# EAGLE board ArduinoWriter (EAGLE 9.6.2)
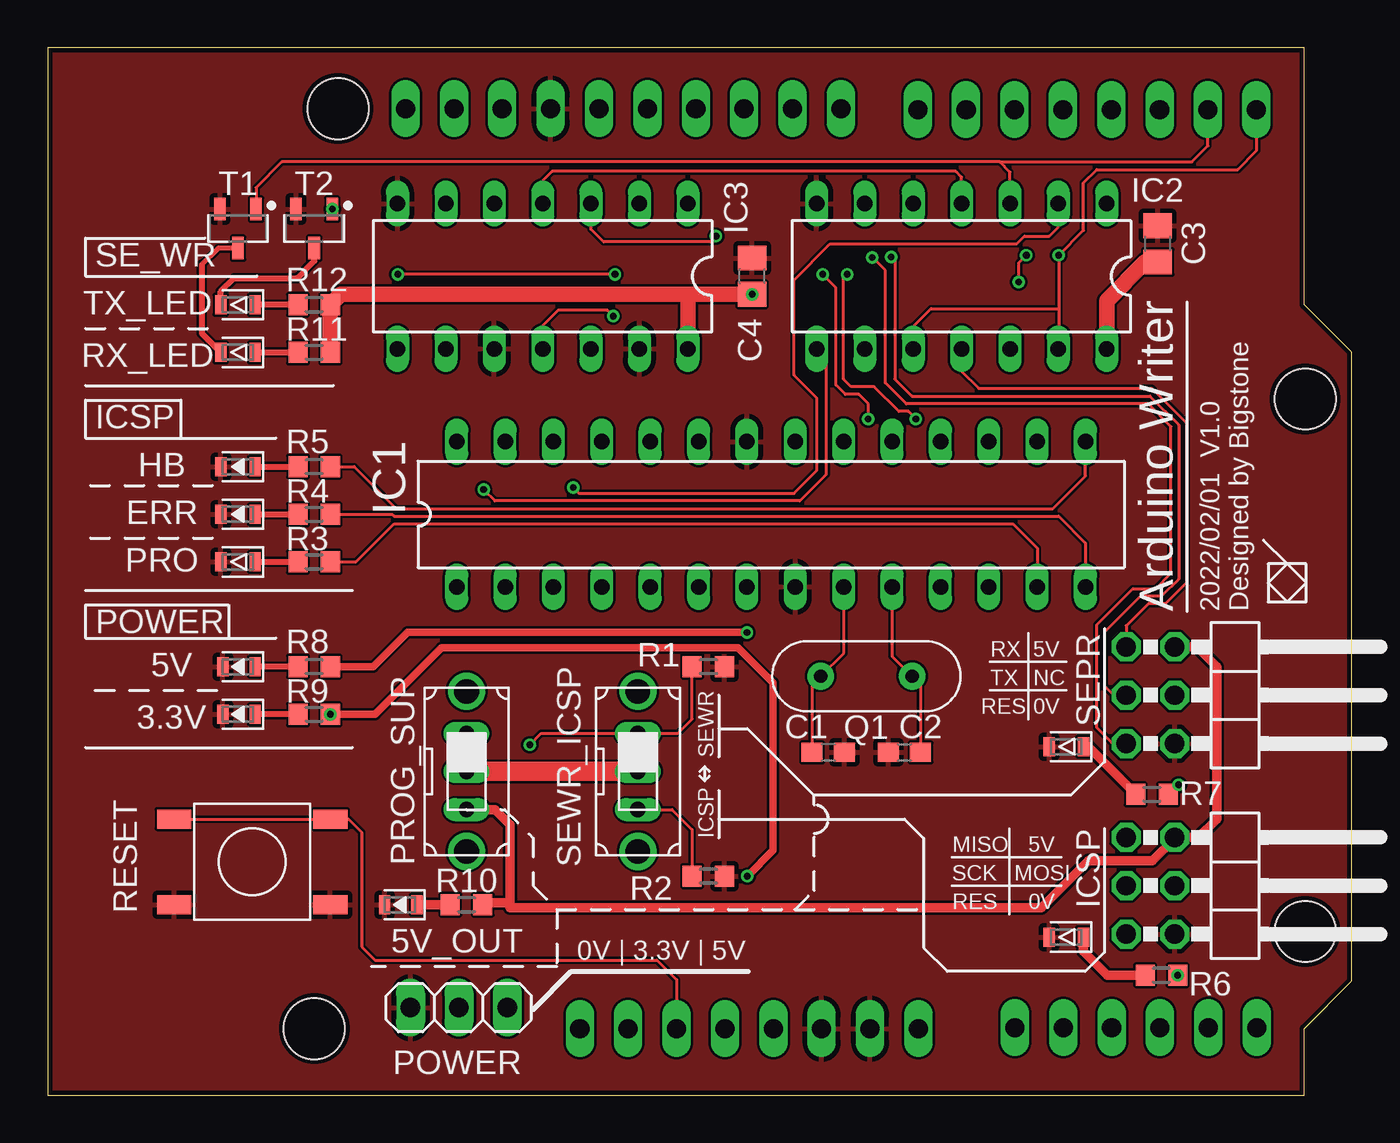
[diagram p0: board, top side]
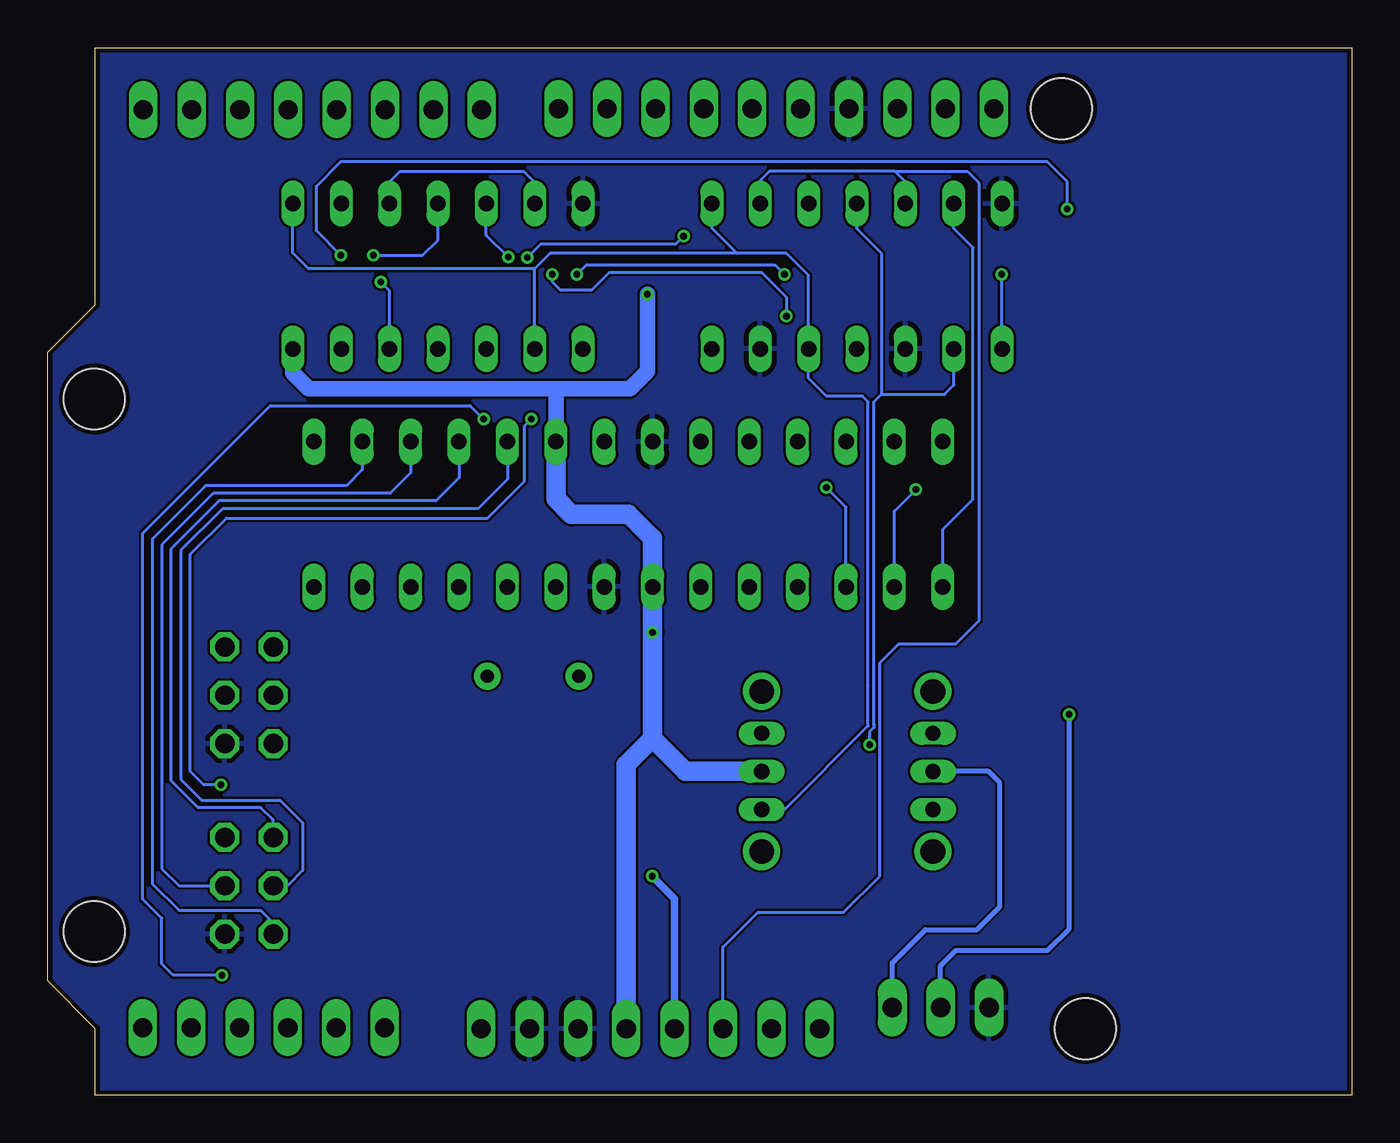
[diagram p1: board, bottom side, seen from below]

Size 68.5 x 55 mm. Coordinates in mm from the lower left corner, seen from the top.
Outline: 0,0 66,0 66,3.5 68.5,6 68.5,39 66,41.5 66,55 0,55 0,0
Copper layers (1*16): Top 0.035mm / dielectric 1.6mm / Bottom 0.035mm
Design rules "JLPCB_2layer": minimum track width 5mil, minimum drill 0.2mm, track to track 5mil, track to pad 5mil, pad to pad 5mil, via to via 5mil, smd to smd 0mil, copper to edge 0.25mm, drill to drill 0.25mm, minimum pad ring 6mil, minimum via ring 6mil, stop-mask expansion 0mil, vias tented up to drill 0.6mm, thermal gap 10mil
Net classes: 1 power: clearance 0.127 mm
Holes 3.2 mm at 14,3.5 15.25,51.8 66.05,36.55 66.05,8.6

## Footprints (pad centres in the part's own frame; a part is rotated, then mirrored left to right if it is on the bottom)
LEDC1608X39N_B = smd 0.6 x 1: 1 -0.9,0; 2 0.8,0
C0603 = smd 1.1 x 1: 1 -0.85,0; 2 0.85,0
C0805 = smd 1.3 x 1.5: 1 -0.95,0; 2 0.95,0
LEDC1608X39N_R = smd 0.6 x 1: 1 -0.9,0; 2 0.9,0
DIL28-3 = drill 0.813 long: 1 -16.51,-3.81; 2 -13.97,-3.81; 3 -11.43,-3.81; 4 -8.89,-3.81; 5 -6.35,-3.81; 6 -3.81,-3.81; 7 -1.27,-3.81; 8 1.27,-3.81; 9 3.81,-3.81; 10 6.35,-3.81; 11 8.89,-3.81; 12 11.43,-3.81; 13 13.97,-3.81; 14 16.51,-3.81; 15 16.51,3.81; 16 13.97,3.81; 17 11.43,3.81; 18 8.89,3.81; 19 6.35,3.81; 20 3.81,3.81; 21 1.27,3.81; 22 -1.27,3.81; 23 -3.81,3.81; 24 -6.35,3.81; 25 -8.89,3.81; 26 -11.43,3.81; 27 -13.97,3.81; 28 -16.51,3.81
DIL14 = drill 0.813 long: 1 -7.62,-3.81; 2 -5.08,-3.81; 3 -2.54,-3.81; 4 0,-3.81; 5 2.54,-3.81; 6 5.08,-3.81; 7 7.62,-3.81; 8 7.62,3.81; 9 5.08,3.81; 10 2.54,3.81; 11 0,3.81; 12 -2.54,3.81; 13 -5.08,3.81; 14 -7.62,3.81
2X03/90 = drill 1.016 octagon: 1 -2.54,-6.35; 2 -2.54,-3.81; 3 0,-6.35; 4 0,-3.81; 5 2.54,-6.35; 6 2.54,-3.81
LEDC1608X39N_G = smd 0.6 x 1: A -0.9,0; K 0.9,0
1X03 = drill 1.016 long: 1 -2.54,0; 2 0,0; 3 2.54,0
SS-12D01-VG4 = drill 0.8 long: COM 0,0; NC -2,0; NO 2,0 | drill 1.3: P$4 -4.2,0; P$5 4.2,0
XTALRR480W50L990T368H350B = drill 0.7 pad 1.4: 1 -2.4,0; 2 2.4,0
R0603 = smd 1 x 1.1: 1 -0.85,0; 2 0.85,0
TS-06104 = smd 1.8 x 1: A1 -4.1,2.25; A2 4.1,2.25; B1 -4.1,-2.25; B2 4.1,-2.25
SOT95P240X110-3N = smd 1.18 x 0.609: 1 -1.024,0.95; 2 -1.024,-0.95; 3 1.024,0
ARDUINOUNO_NOSILK = drill 1 long: 0 63.48,50.75; 1 60.94,50.75; 2 58.4,50.75; 3 55.86,50.75; 3.3V 35.57,2.5; 4 53.32,50.75; 5 50.78,50.75; 5V 38.11,2.5; 6 48.24,50.75; 7 45.7,50.75; 8 41.66,50.8; 9 39.12,50.8; 10 36.58,50.8; 11 34.04,50.8; 12 31.5,50.8; 13 28.96,50.8; A0 50.8,2.55; A1 53.34,2.55; A2 55.88,2.55; A3 58.42,2.55; A4 60.96,2.55; A5 63.5,2.55; AREF 23.88,50.8; GND 26.42,50.8; GND1 43.19,2.5; GND2 40.65,2.5; IOREF 30.49,2.5; P$6 27.95,2.5; RESET 33.03,2.5; SCL 18.8,50.8; SDA 21.34,50.8; VIN 45.73,2.5

## Placement (x,y rotation side)
3.3V  OSBL1608C1A  [LEDC1608X39N_B]  10,20 180 top
5V  OSBL1608C1A  [LEDC1608X39N_B]  10,22.5 180 top
5V_OUT  OSBL1608C1A  [LEDC1608X39N_B]  18.5,10 180 top
C1  22p  [C0603]  41,18 180 top
C2  22p  [C0603]  45,18 0 top
C3  10u  [C0805]  58.3,44.7 90 top
C4  10u  [C0805]  37,43 90 top
ERR  OSHR1608C1A  [LEDC1608X39N_R]  10,30.5 180 top
HB  OSHR1608C1A  [LEDC1608X39N_R]  10,33 180 top
IC1  ATMEGA328-PU  [DIL28-3]  38,30.5 0 top
IC2  TC74HC08AP  [DIL14]  48,43 180 top
IC3  TC74HC32AP  [DIL14]  26,43 180 top
ICSP  [2X03/90]  63,11 270 top
ISPMODE  OSTG1608C1A  [LEDC1608X39N_G]  53.5,8.3 180 top
POWER  [1X03]  21.6,4.6 180 top
PRO  OSTG1608C1A  [LEDC1608X39N_G]  10,28 180 top
PROG_SUP  SS-12D01-VG4  [SS-12D01-VG4]  22,17 270 top
Q1  HUSG-16.000-20  [XTALRR480W50L990T368H350B]  43,22 180 top
R1  10k  [R0603]  34.7,22.5 180 top
R2  10k  [R0603]  34.7,11.5 180 top
R3  1k  [R0603]  14,28 0 top
R4  1k  [R0603]  14,30.5 0 top
R5  1k  [R0603]  14,33 0 top
R6  1k  [R0603]  58.5,6.3 0 top
R7  1k  [R0603]  58,15.8 0 top
R8  1k  [R0603]  14,22.5 0 top
R9  1k  [R0603]  14,20 0 top
R10  1k  [R0603]  22,10 0 top
R11  1k  [R0603]  14,39 0 top
R12  1k  [R0603]  14,41.5 0 top
RESET  TS-06104  [TS-06104]  10.75,12.25 0 top
RX_LED  OSTG1608C1A  [LEDC1608X39N_G]  10,39 180 top
SEPR  [2X03/90]  63,21 270 top
SEWR_ICSP  SS-12D01-VG4  [SS-12D01-VG4]  31,17 270 top
SEWRMODE  OSTG1608C1A  [LEDC1608X39N_G]  53.5,18.3 180 top
T1  IRLML6344TRPBF  [SOT95P240X110-3N]  10,45.5 270 top
T2  IRLML6344TRPBF  [SOT95P240X110-3N]  14,45.5 270 top
TX_LED  OSTG1608C1A  [LEDC1608X39N_G]  10,41.5 180 top
U1  ARRDUINOUNO-NOSILK  [ARDUINOUNO_NOSILK]  0,1 0 top

## Library data of the parts
3.3V 5V 5V_OUT ERR HB ISPMODE PRO RX_LED SEWRMODE TX_LED = LED
C1-C4 = RCL; SPICEPREFIX: C
IC1 = Arduino-AVR
IC2 IC3 = 東芝_74LSシリーズ
ICSP POWER SEPR = pinhead
PROG_SUP SEWR_ICSP = スライドスイッチ
Q1 = 水晶振動子
R1-R12 = RCL; SPICEPREFIX: R
RESET = タクトスイッチ
T1 T2 = FET
U1 = Arduino

## Nets
+3.3V: POWER.2 R9.2 U1.3.3V
+5V: C3.1 C4.1 IC1.7 IC1.20 IC2.14 IC3.14 POWER.1 PROG_SUP.COM R8.2 R11.2 R12.2 SEWR_ICSP.COM U1.5V
ERROR: IC1.14 R4.2
GND: 3.3V.2 5V.2 5V_OUT.2 C1.1 C2.1 C3.2 C4.2 ERR.2 HB.2 IC1.8 IC1.22 IC2.7 IC3.7 IC3.10 IC3.13 ICSP.6 ISPMODE.K POWER.3 PRO.K R1.1 R2.1 RESET.B1 RESET.B2 SEPR.6 SEWRMODE.K T1.2 T2.2 U1.GND U1.GND1 U1.GND2
HEARTBEAT: IC1.15 R5.2
ICSP_RESET: IC1.16 ICSP.5
MISO: IC1.18 ICSP.1
MOSI: IC1.17 ICSP.4
N$1: C2.2 IC1.10 Q1.1
N$2: C1.2 IC1.9 Q1.2
N$3: PRO.A R3.1
N$4: ERR.1 R4.1
N$5: HB.1 R5.1
N$6: ISPMODE.A R6.1
N$7: R7.1 SEWRMODE.A
N$8: 5V.1 R8.1
N$9: 3.3V.1 R9.1
N$10: 5V_OUT.1 R10.1
N$11: RX_LED.K T1.3
N$12: T2.3 TX_LED.K
N$13: R11.1 RX_LED.A
N$14: R12.1 TX_LED.A
PCRX_ICTX: IC2.3 IC2.6 T1.1 U1.1
PCTX_ICRX: IC2.10 IC2.13 T2.1 U1.0
PROG_SUPPLY: ICSP.2 PROG_SUP.NO R10.2 SEPR.2
PROGRAMMING: IC1.13 R3.2
RESET_SIG: IC3.2 IC3.5 RESET.A1 RESET.A2 U1.RESET
SCK: IC1.19 ICSP.3
SE_RESET: IC3.3 SEPR.5
SE_RX: IC2.11 SEPR.1
SE_SW: IC2.4 IC2.12 IC3.4 IC3.9 R1.2 SEWR_ICSP.NC
SE_SW_LED: IC3.8 R7.2
SE_TX: IC2.5 SEPR.3
WR_SW: IC2.1 IC2.9 IC3.1 IC3.12 R2.2 SEWR_ICSP.NO
WR_SW_LED: IC3.11 R6.2
WRITER_RESET: IC1.1 IC3.6
WRITER_RX: IC1.2 IC2.8
WRITER_TX: IC1.3 IC2.2

## Tracks (layer width: path | path; a pad name or v marks a point on that pad's centre or on a via)
+3.3V  (via drill 0.35)
  Top 0.254: 15.07,19.78 R9.2
  Top 0.406: R9.2 17.2,20 20.7,23.5 36.25,23.5 38.1,21.65 38.1,12.85 v36.75,11.5
  Bottom 0.254: POWER.2 21.6,6.8 20.8,7.6 16,7.6 14.85,8.75 R9.2
  Bottom 0.406: v36.75,11.5 35.57,10.32 U1.3.3V
  other vias: 14.85,20
+5V  (via drill 0.35)
  Top 0.406: R8.2 17.1,22.5 18.9,24.3 v36.73,24.3
  Top 0.813: R11.2 R12.2 15.4,42.05 33.6,42.05 | 33.6,42.05 C4.1 | IC3.14 33.62,42.03 33.6,42.05 | IC2.14 55.62,41.72 57.65,43.75 C3.1
  Top 1.016: PROG_SUP.COM SEWR_ICSP.COM
  Bottom 0.254: POWER.1 24.14,6.96 22.4,8.7 19.7,8.7 18.5,9.9 18.5,16.4 19.1,17 PROG_SUP.COM
  Bottom 0.813: IC1.20 41.81,36.99 41.7,37.1 | 41.7,37.1 37.9,37.1 37,38 C4.1 | IC2.14 55.62,37.92 54.8,37.1 41.7,37.1
  Bottom 1.016: IC1.20 41.81,31.31 41,30.5 38,30.5 36.73,29.23 IC1.7 v36.73,24.3 36.73,18.73 | SEWR_ICSP.COM 35,17 36.73,18.73 | U1.5V 38.11,17.35 36.73,18.73
  other vias: 37,42.05
ERROR
  Top 0.15: R4.2 18.1,30.5
  Top 0.152: 18.1,30.5 18.2,30.4 53.1,30.4 54.51,28.99 IC1.14
GND
  pour Top: 0,0 0,55 69,55 69,0
  pour Bottom: 0,55 0,0 69,0 69,55
HEARTBEAT
  Top 0.152: R5.2 16.1,33 18.3,30.8 52.8,30.8 54.51,32.51 IC1.15
ICSP_RESET
  Bottom 0.152: IC1.16 51.97,32.83 52.8,32 60.2,32 63,29.2 63,11.1 61.6,9.7 57.3,9.7 56.65,9.05 ICSP.5
MISO
  Bottom 0.152: IC1.18 46.89,32.41 48.1,31.2 59.5,31.2 62,28.7 62,16.5 60.6,15.1 57.3,15.1 56.65,14.45 ICSP.1
MOSI
  Bottom 0.152: IC1.17 49.43,32.67 50.5,31.6 59.8,31.6 62.5,28.9 62.5,11.9 61.6,11 ICSP.4
N$1
  Top 0.152: IC1.10 44.35,23.05 Q1.1 45.85,21.55 C2.2
N$2
  Top 0.152: IC1.9 41.81,23.21 Q1.2 40.15,21.55 C1.2
N$3
  Top 0.305: PRO.A R3.1
N$4
  Top 0.305: ERR.1 R4.1
N$5
  Top 0.305: HB.1 R5.1
N$6
  Top 0.508: R6.1 55.65,6.3 54.4,7.55 ISPMODE.A
N$7
  Top 0.508: R7.1 54.65,18.3 SEWRMODE.A
N$8
  Top 0.305: R8.1 5V.1
N$9
  Top 0.305: R9.1 3.3V.1
N$10
  Top 0.508: 5V_OUT.1 R10.1
N$11
  Top 0.254: T1.3 8.98,44.48 8.1,43.6
  Top 0.305: 8.1,43.6 8.1,40 RX_LED.K
N$12
  Top 0.305: TX_LED.K 9.1,42.2 9.8,42.9 13.1,42.9 14,43.8 T2.3
N$13
  Top 0.305: RX_LED.A R11.1
N$14
  Top 0.305: R12.1 TX_LED.A
PCRX_ICTX
  Top 0.152: U1.1 60.94,49.84 60.1,49 50,49 | 50,49 12.3,49 10.95,47.65 T1.1 | IC2.3 50.54,48.46 50,49
  Bottom 0.152: IC2.3 50.54,47.96 50,48.5 43.5,48.5 42.92,47.92 IC2.6
PCTX_ICRX  (via drill 0.35)
  Top 0.152: IC2.10 45.46,40.36 46.4,41.3 53.1,41.3 | 53.1,41.3 53.1,39.21 IC2.13 | 53.1,41.3 v53.1,44.1 54.4,45.4 54.4,47.9 55.1,48.6 62.5,48.6 63.5,49.6 63.5,51.73 U1.0
  Bottom 0.152: T2.1 14.95,47.95 16,49 53.1,49 54.4,47.7 54.4,45.4 v53.1,44.1
  other vias: 14.95,46.52
PROG_SUPPLY
  Top 0.508: PROG_SUP.NO 23.5,15 24.3,14.2 24.3,10.6 24.3,10.1 | SEPR.2 60.36,23.54 61.4,22.5 61.4,14.5 60.44,13.54 ICSP.2 59.23,13.5 58.03,12.3 54.65,12.3 52.2,9.85 24.3,9.85 24.3,10.1 | R10.2 22.95,10.1 24.3,10.1
PROGRAMMING
  Top 0.152: R3.2 16.2,28 18.2,30 50.7,30 51.97,28.73 IC1.13
RESET_SIG
  Top 0.152: RESET.A1 RESET.A2 15.8,14.5 16.5,13.8 16.5,7.8 17.2,7.1 32,7.1 33.03,6.07 U1.RESET
  Bottom 0.152: IC3.5 23.46,47.96 24,48.5 | 24,48.5 30.6,48.5 31.1,48 31.1,46.83 IC3.2 | U1.RESET 33.03,7.77 31.2,9.6 26.7,9.6 24.8,11.51 24.8,22.7 23.8,23.7 20.8,23.7 19.59,24.91 19.59,47.9 20.2,48.5 24,48.5
SCK
  Bottom 0.152: IC1.19 44.35,32.35 45.9,30.8 59.3,30.8 61.5,28.6 61.5,16.6 60.4,15.5 56.3,15.5 55.1,14.3 55.1,11.8 55.9,11 ICSP.3
SE_RESET  (via drill 0.35)
  Top 0.152: SEPR.5 55.94,18.46 55.1,19.3 55.1,24.7 57,26.6 58.2,26.6 59,27.4 59,35.1 57.8,36.3 45.1,36.3 44,37.4 44,43.3 43.31,43.99 v43.3,43.99 | v35.1,45.1 34.8,44.8 29.2,44.8 28.54,45.46 IC3.3
  Bottom 0.152: v43.3,43.99 42.59,44.7 35.5,44.7 v35.1,45.1
SE_RX
  Top 0.152: IC2.11 48,38.01 48.9,37.1 57.99,37.1 59.8,35.3 59.8,26.9 58.7,25.8 57.8,25.8 56.65,24.65 SEPR.1
SE_SW  (via drill 0.35)
  Top 0.15: v25.33,18.4 25.93,19 SEWR_ICSP.NC 33.1,19 33.85,19.75 R1.2
  Top 0.152: IC2.4 48,48.2 47.7,48.5 26.5,48.5 26,48 IC3.4 | v51,42.7 51,43.7 v51.4,44.1
  Bottom 0.15: 25.1,19.5 25.1,19.31 25.33,19.08 v25.33,18.4
  Bottom 0.152: IC3.4 26,45.5 24.7,44.2 24.7,36.8 | 25.1,19.4 25.1,19.5 25.1,36.4 24.7,36.8 | 24.7,36.8 21.4,36.8 20.9,37.3 20.9,39.17 IC3.9 | IC2.12 50.54,42.24 v51,42.7 | v51.4,44.1 48.8,44.1 48,44.9 IC2.4
SE_SW_LED  (via drill 0.35)
  Top 0.152: R7.2 59.35,16.3 v59.4,16.3 | v43.1,35.5 43.1,36.3 42.6,36.8 41.9,36.8 41.4,37.3 41.4,42.4 v40.7,43.1 | v29.8,43.1 v18.4,43.1
  Bottom 0.152: v59.4,16.3 60.3,16.3 61,17 61,28.4 59.1,30.3 45.4,30.3 43.46,32.24 43.46,35.14 v43.1,35.5 | v40.7,43.1 40.2,43.6 30.3,43.6 v29.8,43.1 | v18.4,43.1 18.4,39.21 IC3.8
SE_TX  (via drill 0.35)
  Top 0.152: v44.3,44 44.5,43.8 44.5,37.6 45.4,36.7 57.9,36.7 59.4,35.2 59.4,27.1 58.5,26.2 57.4,26.2 55.5,24.3 55.5,21.5 56,21 SEPR.3
  Bottom 0.152: v44.3,44 45.46,45.16 IC2.5
WR_SW
  Top 0.15: SEWR_ICSP.NO 32.8,15 33.85,13.95 R2.2
  Bottom 0.15: SEWR_ICSP.NO 29.8,15 25.41,19.39 25.41,21.5
  Bottom 0.152: 32.3,44.2 29.7,44.2 28.54,43.04 IC3.12 28.54,37.64 27.6,36.7 25.7,36.7 25.41,36.41 25.41,21.5 | IC3.1 33.62,45.52 32.3,44.2 | 32.3,44.2 42.1,44.2 42.92,43.38 | IC2.9 42.92,43.38 | 42.92,43.38 54.78,43.38 55.62,44.22 IC2.1
WR_SW_LED  (via drill 0.35)
  Top 0.152: v45.6,35.5 45.2,35.9 44.7,35.9 43.4,37.2 42.2,37.2 41.8,37.6 41.8,42.9 v42,43.1 | v29.7,40.9 29.4,41.2 26.8,41.2 26,40.4 IC3.11
  Bottom 0.152: R6.2 61.9,6.3 62.5,6.9 62.5,9.3 63.5,10.3 63.5,29.5 56.8,36.2 46.3,36.2 v45.6,35.5 | v42,43.1 42,42.7 41.6,42.3 39.9,42.3 39,43.2 31,43.2 29.7,41.9 v29.7,40.9
  other vias: 59.35,6.3
WRITER_RESET
  Bottom 0.152: IC1.1 21.49,29.71 19.9,31.3 19.9,44.5 20.92,45.52 IC3.6
WRITER_RX  (via drill 0.35)
  Top 0.152: v22.9,31.8 23.5,31.2 39.5,31.2 40.9,32.6 40.9,38.67 IC2.8
  Bottom 0.152: IC1.2 24.03,30.67 v22.9,31.8
WRITER_TX  (via drill 0.35)
  Top 0.152: v27.6,31.9 27.9,31.6 39.2,31.6 40.4,32.8 40.4,36.6 39.2,37.8 39.2,42.8 41.1,44.7 50.9,44.7 51.3,45.1 52.6,45.1 53.08,45.58 IC2.2
  Bottom 0.152: IC1.3 26.57,30.87 v27.6,31.9 | 53.1,46.83 IC2.2

## Text on the board
tPlace: SE_WR | ICSP | Arduino Writer | 2022/02/01 V1.0 / Designed by Bigstone | POWER | RX | 5V | TX | NC | RES | 0V | SEWR | ICSP | MISO | 5V | SCK | MOSI | RES | 0V | 0V | 3.3V | 5V